# Altium PCB PCB1.PcbDoc
Units mm, origin at the board's own origin, x right, y up, seen from the top; angles counter-clockwise.
Board outline 24.84 x 32.36 mm, 4 copper layers (Top Layer, Layer 1, Layer 2, Bottom Layer), stack 0.44 mm thick; 6 components, 10 nets, 61 pads, 6 vias.
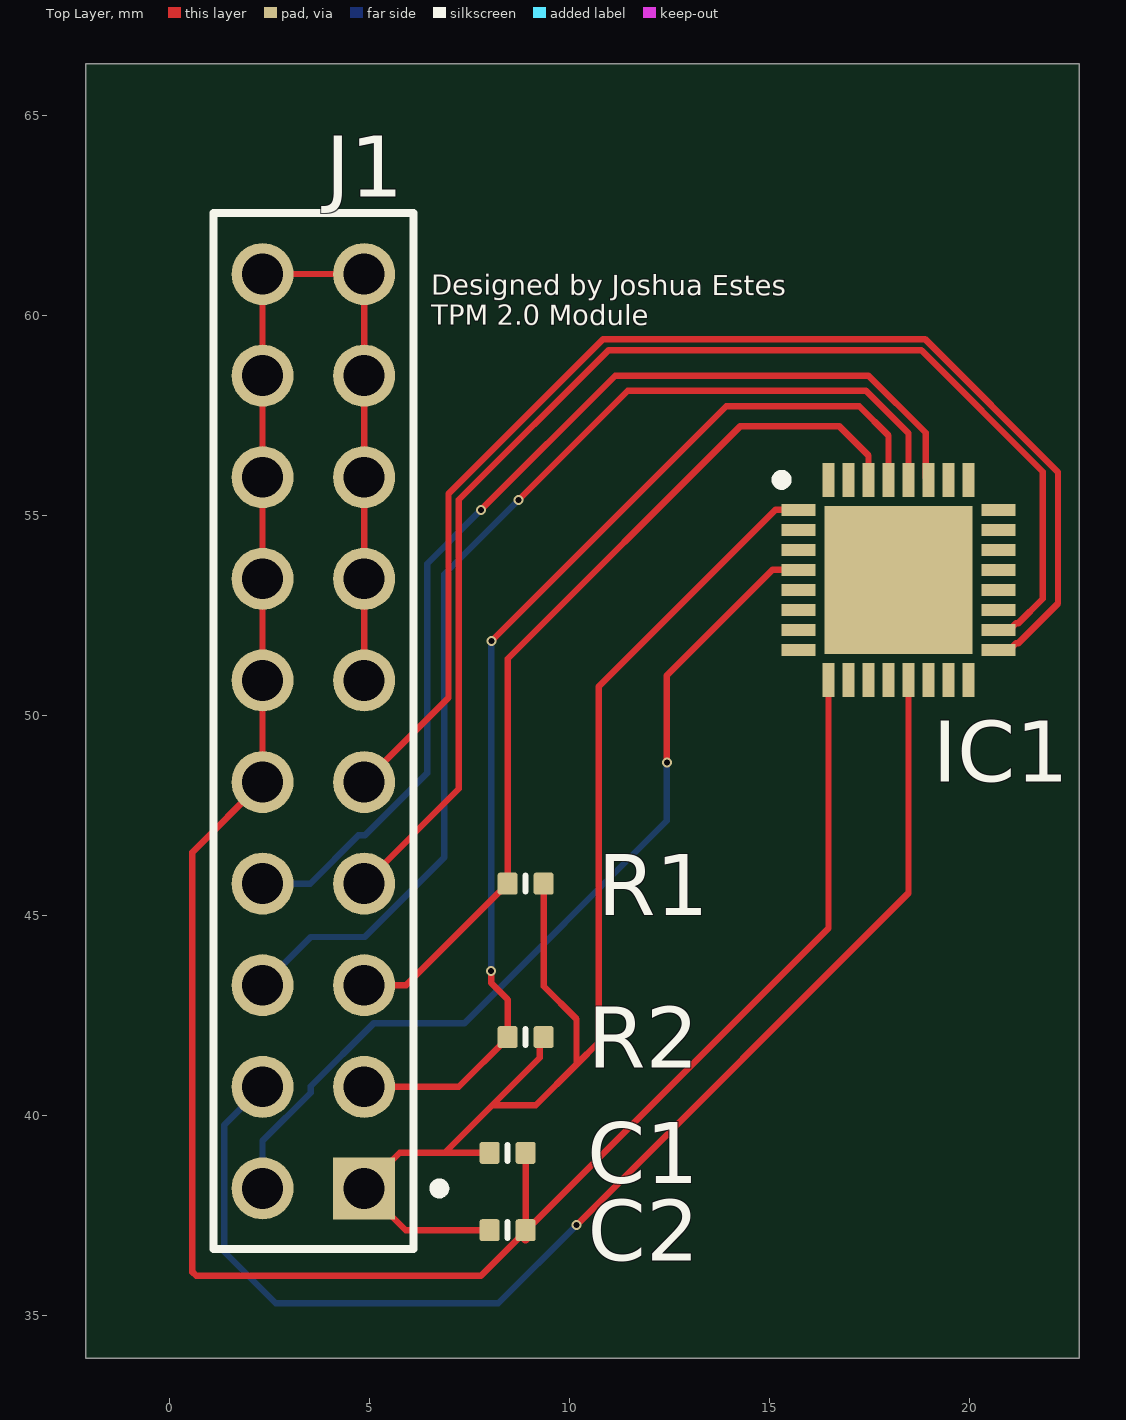
[diagram p0: Top Layer view]
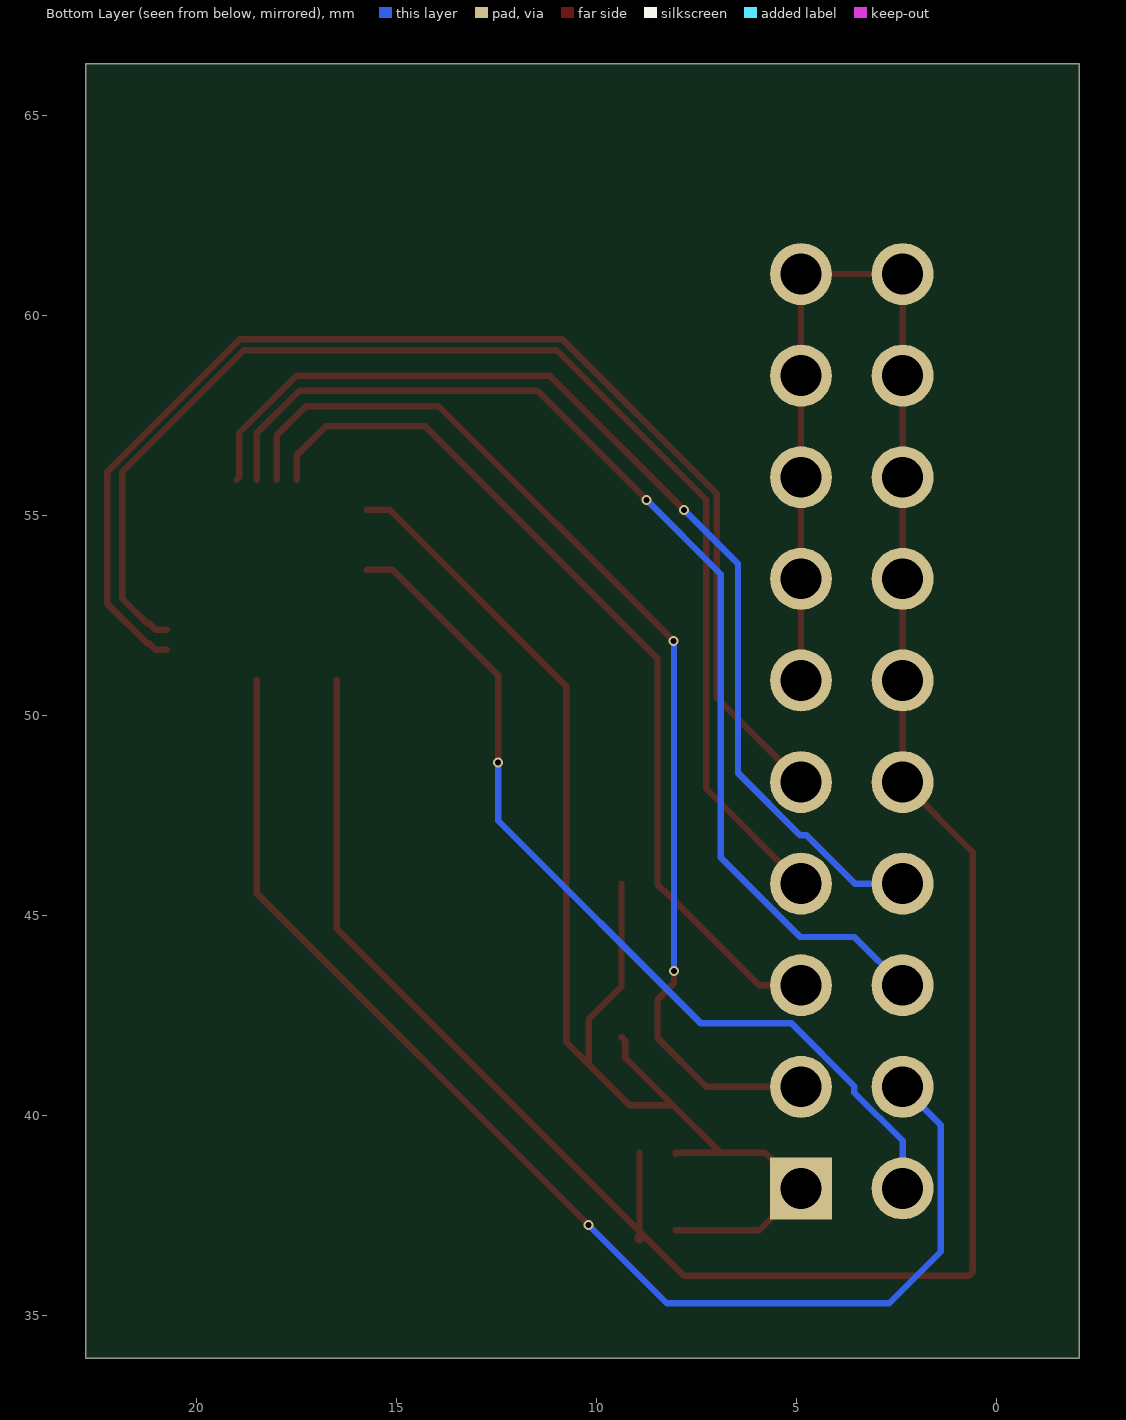
[diagram p1: Bottom Layer view, seen from below]
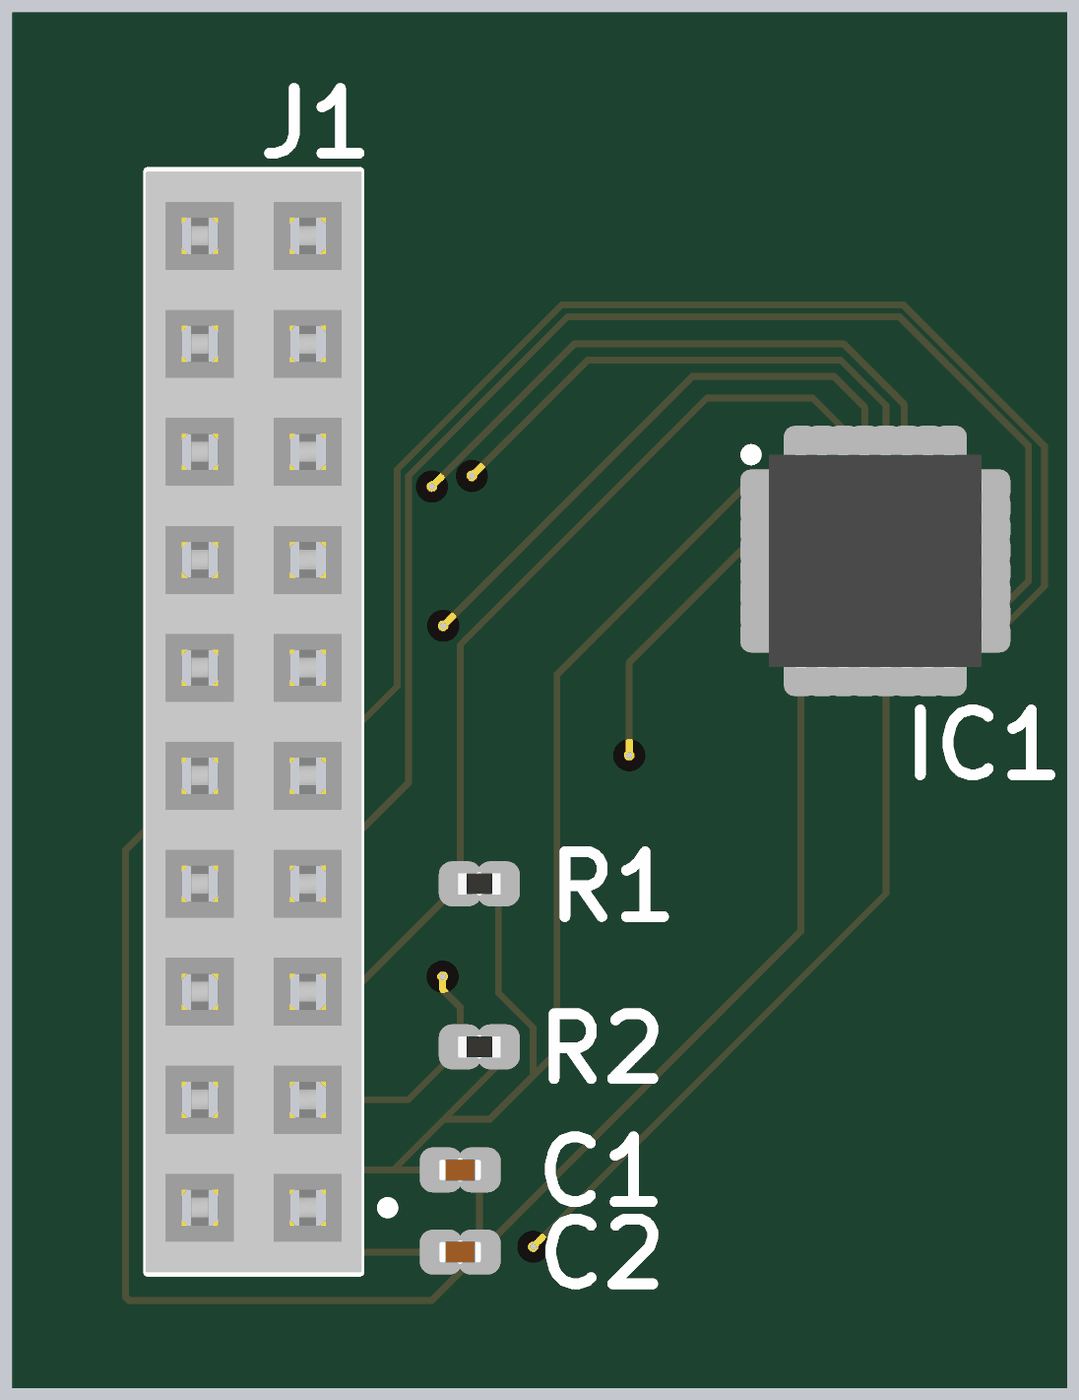
[diagram p2: 3D render of the assembled board from above, using the file's embedded part models]

## Layer stack, top to bottom
Top Solder: solder mask 0.01, Solder Resist, Dk 3.3
Top Layer: signal copper 0.035
Dielectric 1: prepreg 0.1, PP-006, Dk 4.1
Layer 1: signal copper 0.035
Dielectric1: core 0.1, FR-4, Dk 4.3
Layer 2: signal copper 0.035
Dielectric 2: prepreg 0.1, PP-006, Dk 4.1
Bottom Layer: signal copper 0.035
Bottom Solder: solder mask 0.01, Solder Resist, Dk 3.3

## Board outline
-2.083,66.294 22.758,66.294 22.758,33.934 -0.838,33.934 -2.083,33.934

## Design rules (kind name [scope] priority, off if disabled: settings)
Clearance [All] p1: gap=0.1 ignorepadtopadclearanceinfootprint=FALSE
DiffPairsRouting [All] p1: maxlimit=0.254 minlimit=0.254 mostfreqgap=0.254 toplayer_minwidth=0.254 toplayer_maxwidth=0.254 toplayer_prefwidth=0.254 midlayer1_minwidth=0.254 midlayer1_maxwidth=0.254 midlayer1_prefwidth=0.254 midlayer2_minwidth=0.254 midlayer2_maxwidth=0.254 midlayer2_prefwidth=0.254 bottomlayer_minwidth=0.254 bottomlayer_maxwidth=0.254 bottomlayer_prefwidth=0.254 maxuncoupledlength=12.7
HoleSize [All] p1: absolutevalues=TRUE maxlimit=7.62 minlimit=0.254 maxpercent=80.000 minpercent=20.000
MinimumAnnularRing [All] p1: minimumring=0.254
PasteMaskExpansion [All] p1: expansion=0.254
PlaneClearance [All] p1: clearance=0.381
PlaneConnect [All] p1: pad.planeconnectstyle=Relief pad.reliefexpansion=0.508 pad.reliefentries=4 pad.reliefconductorwidth=0.254 pad.reliefairgap=0.254 via.planeconnectstyle=Direct via.reliefexpansion=0.508 via.reliefentries=4 via.reliefconductorwidth=0.254 via.reliefairgap=0.254
PolygonConnect [All] p1: thpad.connectstyle=Relief thpad.reliefconductorwidth=0.254 thpad.reliefentries=4 thpad.polygonreliefangle="90 Angle" thpad.airgapwidth=0.254 smdpad.connectstyle=Relief smdpad.reliefconductorwidth=0.254 smdpad.reliefentries=4 smdpad.polygonreliefangle="90 Angle" smdpad.airgapwidth=0.254 via.connectstyle=Direct via.reliefconductorwidth=0.254 via.reliefentries=4 via.polygonreliefangle="90 Angle" via.airgapwidth=0.254
RoomDefinition Sheet1 [InComponentClass('Sheet1')] p1: confinementstyle=ConfineIn formatcopy=TRUE lockcomponents=FALSE outline -189.586,-112.446 -138.786,-112.446 -138.786,-87.046 -189.586,-87.046
RoutingVias [All] p1: holewidth=0.15 width=0.25 viastyle="Through Hole" minholewidth=0.15 minwidth=0.25 maxholewidth=0.15 maxwidth=0.25
SMDNeckDown [All] p1: percent=100.000
SilkToSolderMaskClearance SilkscreenOverComponentPads [IsPad] p1: minsilkscreentomaskgap=0.254 clearancetoexposedcopper=TRUE
SolderMaskExpansion [All] p1: expansion=0.254 istentingtop=FALSE
Width [All] p1: maxlimit=0.254 minlimit=0.16 preferedwidth=0.254 toplayer_maxwidth=0.16 toplayer_prefwidth=0.16 midlayer1_minwidth=0.254 midlayer2_minwidth=0.254 bottomlayer_maxwidth=0.16 bottomlayer_prefwidth=0.16 minimp=50.000000 maximp=50.000000 favimp=50.000000
24 further rules are at their usual default settings.

## Components (designator, comment, footprint, x,y, rotation, side; value= is the part's Value field where it differs from the comment)
C1 "Capacitor 100nF +/-20% 10V 0402" CAPC0402(1005)60_L 8.465,39.066 r180 top value=100nF
C2 "Capacitor 10nF +/-20% 50V 0402" CAPC0402(1005)60_L 8.465,37.132 r180 top value=10nF
IC1 "ST33HTPH2X32AHD5" QFN50P500X500X100-33N-D 18.237,53.391 r0 top
J1 "PPPC102LFBN-RC" SLIN-PPPC102LFBN-RC_V 3.607,49.606 r90 top
R1 "Resistor 2K2  +/-5 % 0402 63 mW" RESC0402(1005)_L 8.915,45.796 r180 top value=2.2k
R2 "Resistor 2K2  +/-5 % 0402 63 mW" RESC0402(1005)_L 8.915,41.961 r180 top value=2.2k

## Footprints (in the part's own frame and the unit in brackets; to place one, negate y for a bottom-side part, rotate by r counter-clockwise, add the part's x,y. Pads: shape width x height; smd on the part's side, far side on the other; paste and mask are expansions set on the pad)
CAPC0402(1005)60_L [mm] "Chip Capacitor, Body 1.0x0.5mm, Height 0.6mm, IPC High Density"
  rrect25% 0.5x0.55 smd: 1(-0.45,0) 2(0.45,0)
  silkscreen extent 0,-0.2 0,0.2, body extent -0.5,-0.25 0.5,0.25, height 0.6
QFN50P500X500X100-33N-D [mm]
  rect 0.85x0.3 smd: 1(-2.5,1.75) 2(-2.5,1.25) 3(-2.5,0.75) 4(-2.5,0.25) 5(-2.5,-0.25) 6(-2.5,-0.75) 7(-2.5,-1.25) 8(-2.5,-1.75) 17(2.5,-1.75) 18(2.5,-1.25) 19(2.5,-0.75) 20(2.5,-0.25) 21(2.5,0.25) 22(2.5,0.75) 23(2.5,1.25) 24(2.5,1.75)
  rect 0.3x0.85 smd: 9(-1.75,-2.5) 10(-1.25,-2.5) 11(-0.75,-2.5) 12(-0.25,-2.5) 13(0.25,-2.5) 14(0.75,-2.5) 15(1.25,-2.5) 16(1.75,-2.5) 25(1.75,2.5) 26(1.25,2.5) 27(0.75,2.5) 28(0.25,2.5) 29(-0.25,2.5) 30(-0.75,2.5) 31(-1.25,2.5) 32(-1.75,2.5)
  rect 3.7x3.7 smd: 33(0,0)
  silkscreen extent -3.05,2.38 -2.8,2.62, body extent -2.51,-2.51 2.51,2.51, height 0.9
RESC0402(1005)_L [mm] "Chip Resistor, Body 1.0x0.5mm, IPC High Density"
  rrect25% 0.5x0.55 smd: 1(-0.45,0) 2(0.45,0)
  silkscreen extent 0,-0.2 0,0.2, body extent -0.5,-0.25 0.5,0.25, height 0.3
SLIN-PPPC102LFBN-RC_V [mm] "THD, 20-Leads, Body 25.9x5mm, Pitch 2.54mm"
  rect 1.55x1.55 hole 1.02: 1(-11.43,-1.27)
  round 1.55 hole 1.02: 2(-11.43,1.27) 3(-8.89,-1.27) 4(-8.89,1.27) 5(-6.35,-1.27) 6(-6.35,1.27) 7(-3.81,-1.27) 8(-3.81,1.27) 9(-1.27,-1.27) 10(-1.27,1.27) 11(1.27,-1.27) 12(1.27,1.27) 13(3.81,-1.27) 14(3.81,1.27) 15(6.35,-1.27) 16(6.35,1.27) 17(8.89,-1.27) 18(8.89,1.27) 19(11.43,-1.27) 20(11.43,1.27)
  silkscreen extent -12.95,-3.27 12.95,2.5, body extent -12.95,-2.54 12.95,2.54, height 8.5

## Part data
C1: library part CMP-001-00061-3, "Chip Capacitor, 100nF +/-20%, 10V, 0402, Thickness 0.6 mm", Case/Package=0402, Max Operating Temperature=85°C, Min Operating Temperature=-55°C, Tolerance=20%, Voltage Rating=10V, Mounting Technology=SMT, Pins=2
C2: library part CMP-001-00069-3, "Chip Capacitor, 10nF +/-20%, 50V, 0402, Thickness 0.6 mm", Case/Package=0402, Max Operating Temperature=85°C, Min Operating Temperature=-55°C, Tolerance=5%, Voltage Rating=50V, Mounting Technology=SMT, Pins=2
IC1: library part CMP-020-00025-2, "Microprocessor Circuit - Long-term evolution TPM 2.0 device with an I2C interface", Case/Package="VFQFPN32 ECOPACK2", Max Operating Temperature=85°C, Max Supply Voltage=3.6V, Min Operating Temperature=-25°C, Min Supply Voltage=-300mV, Nominal Supply Voltage=3.3V, I/Os=4, Interface=I2C, Pins=33, RoHS Compliant=Yes
J1: library part CMP-002-00029-2, "Female Header, Pitch 2.54 mm, 2 x 10 Position, Height 8.75 mm, Tail Length 3.2 mm, -40 to 105 degC, RoHS, Bulk", Manufacturer=Sullins, Max Operating Temperature=105°C, Min Operating Temperature=-40°C, Package Description="Female Header, Pitch 2.54 mm, 2 x 10 Position, Height 8.75 mm, Tail Length 3.2 mm", Case/Package=PPPC102LFBN-RC, Connector Type=Header, Datasheet URL=http://datasheet.octopart.com/PPPC102LFBN-RC-Sullins-datasheet-8327184.pdf, Datasheet Version="Rev. D, 10/2007", Gender=Female, Mounting Technology=TH, Package Reference=PPPC102LFBN-RC, RoHS Compliant=Unknown
R1 R2: library part CMP-009-00166-3, "Chip Resistor, 2,2 kOhms, +/-5 %, 63 mW, -55 to 155 degC, 0402", Case/Package=0402, Max Operating Temperature=155°C, Min Operating Temperature=-55°C, Power=63mW, Tolerance=5%, Pins=2

## Via types
v1: diameter 0.25, hole 0.15, Top Layer to Bottom Layer, 6 vias

## Nets (pads, with @x,y where several pads share a name; then routed paths per layer and width w, separated by ;. In a path a pad name is that pad's centre, name@x,y a point inside that pad or via, vN(x,y) a via of type N, cw(c..) or ccw(c..) an arc to the next point about the centre after c; other vN are vias at no path point)
NetC1_1: C1.1 C2.1 IC1.9 J1.10 J1.11 J1.12 J1.13 J1.14 J1.15 J1.16 J1.17 J1.18 J1.19 J1.20 | length 66.1
  Top Layer w0.16: J1.11 J1.13 J1.15 J1.17 J1.19 J1.20 J1.18 J1.16 J1.14 J1.12 J1.10 0.584,46.584 0.584,36.086 0.678,35.992 7.8,35.992 16.487,44.679 IC1.9 ; C2.1 C1.1
  Top Layer w0.254: C2.1@8.915,36.932 C2.1@8.915,36.957
NetC1_2: C1.2 C2.2 IC1.1 J1.1 R1.1 R2.1 | length 34.9
  Top Layer w0.16: C2.2@8.012,37.135 C2.2 5.921,37.132 J1.1 5.767,39.066 6.891,39.066 ; C1.2@8.015,39.041 C1.2 ; C1.2 6.891,39.066 ; R2.1 9.271,41.866 9.271,41.446 8.081,40.256 ; R1.1 9.365,43.231 10.185,42.411 10.185,41.275 ; IC1.1 15.161,55.141 10.744,50.724 10.744,41.834 10.185,41.275 ; 6.891,39.066 8.081,40.256 ; 8.081,40.256 9.166,40.256 10.185,41.275
NetIC1_4: IC1.4 J1.2 | length 22.7
  Top Layer w0.16: v1(12.446,48.819) 12.446,50.999 15.087,53.641 IC1.4
  Bottom Layer w0.16: J1.2 2.337,39.366 3.542,40.571 3.542,40.732 5.111,42.301 7.376,42.301 12.446,47.371 v1(12.446,48.819)
NetIC1_13: IC1.13 J1.4 | length 31.7
  Top Layer w0.16: v1(10.185,37.259) 18.487,45.561 IC1.13
  Bottom Layer w0.16: J1.4 1.382,39.761 1.382,36.591 2.667,35.306 8.232,35.306 v1(10.185,37.259)
NetIC1_17: IC1.17 J1.9 | length 31.6
  Top Layer w0.16: J1.9 6.986,50.445 6.986,55.545 10.851,59.411 18.898,59.411 22.225,56.083 22.225,52.799 21.237,51.811 21.182,51.811 21.012,51.641 IC1.17
NetIC1_18: IC1.18 J1.7 | length 32.6
  Top Layer w0.16: J1.7 7.246,48.165 7.246,55.391 10.986,59.131 18.809,59.131 21.844,56.097 21.844,52.918 21.237,52.311 21.182,52.311 21.012,52.141 IC1.18
NetIC1_27: IC1.27 J1.8 | length 26.7
  Top Layer w0.16: v1(7.8,55.141) 11.155,58.496 17.487,58.496 18.917,57.066 18.917,55.961 IC1.27
  Bottom Layer w0.16: J1.8 3.526,45.796 4.731,47.001 4.893,47.001 6.452,48.56 6.452,53.792 v1(7.8,55.141)
NetIC1_28: IC1.28 J1.6 | length 28.1
  Top Layer w0.16: v1(8.74,55.391) 11.465,58.115 17.424,58.115 18.487,57.052 IC1.28
  Bottom Layer w0.16: J1.6 3.542,44.461 4.893,44.461 6.882,46.451 6.882,53.532 v1(8.74,55.391)
NetIC1_29: IC1.29 J1.3 R2.2 | length 28
  Top Layer w0.16: J1.3 7.246,40.716 8.465,41.936 R2.2 8.465,42.898 8.052,43.311 v1(8.052,43.612) ; v1(8.065,51.867) 13.933,57.734 17.253,57.734 17.987,57 IC1.29
  Bottom Layer w0.16: v1(8.052,43.612) 8.052,51.853 v1(8.065,51.867)
NetIC1_30: IC1.30 J1.5 R1.2 | length 22.6
  Top Layer w0.16: J1.5 5.925,43.256 8.27,45.601 8.295,45.601 8.465,45.771 R1.2 8.465,51.417 14.274,57.226 16.761,57.226 17.487,56.5 IC1.30
pads on no net: IC1.2 IC1.3 IC1.5 IC1.6 IC1.7 IC1.8 IC1.10 IC1.11 IC1.12 IC1.14 IC1.15 IC1.16 IC1.19 IC1.20 IC1.21 IC1.22 IC1.23 IC1.24 IC1.25 IC1.26 IC1.31 IC1.32 IC1.33

## Silkscreen, mask and mechanical layers (free items; w line width, h text height)
Top Overlay:
  text "Designed by Joshua Estes / TPM 2.0 Module" at 6.553,59.766 h0.5 r359.89